# Altium PCB ColorSS_v2_PCB.PcbDoc
Units mm, origin at the board's own origin, x right, y up, seen from the top; angles counter-clockwise.
Board outline 22.5 x 38.5 mm, 2 copper layers (Top Layer, Bottom Layer), stack 1.571 mm thick; 25 components, 22 nets, 79 pads, 12 vias.
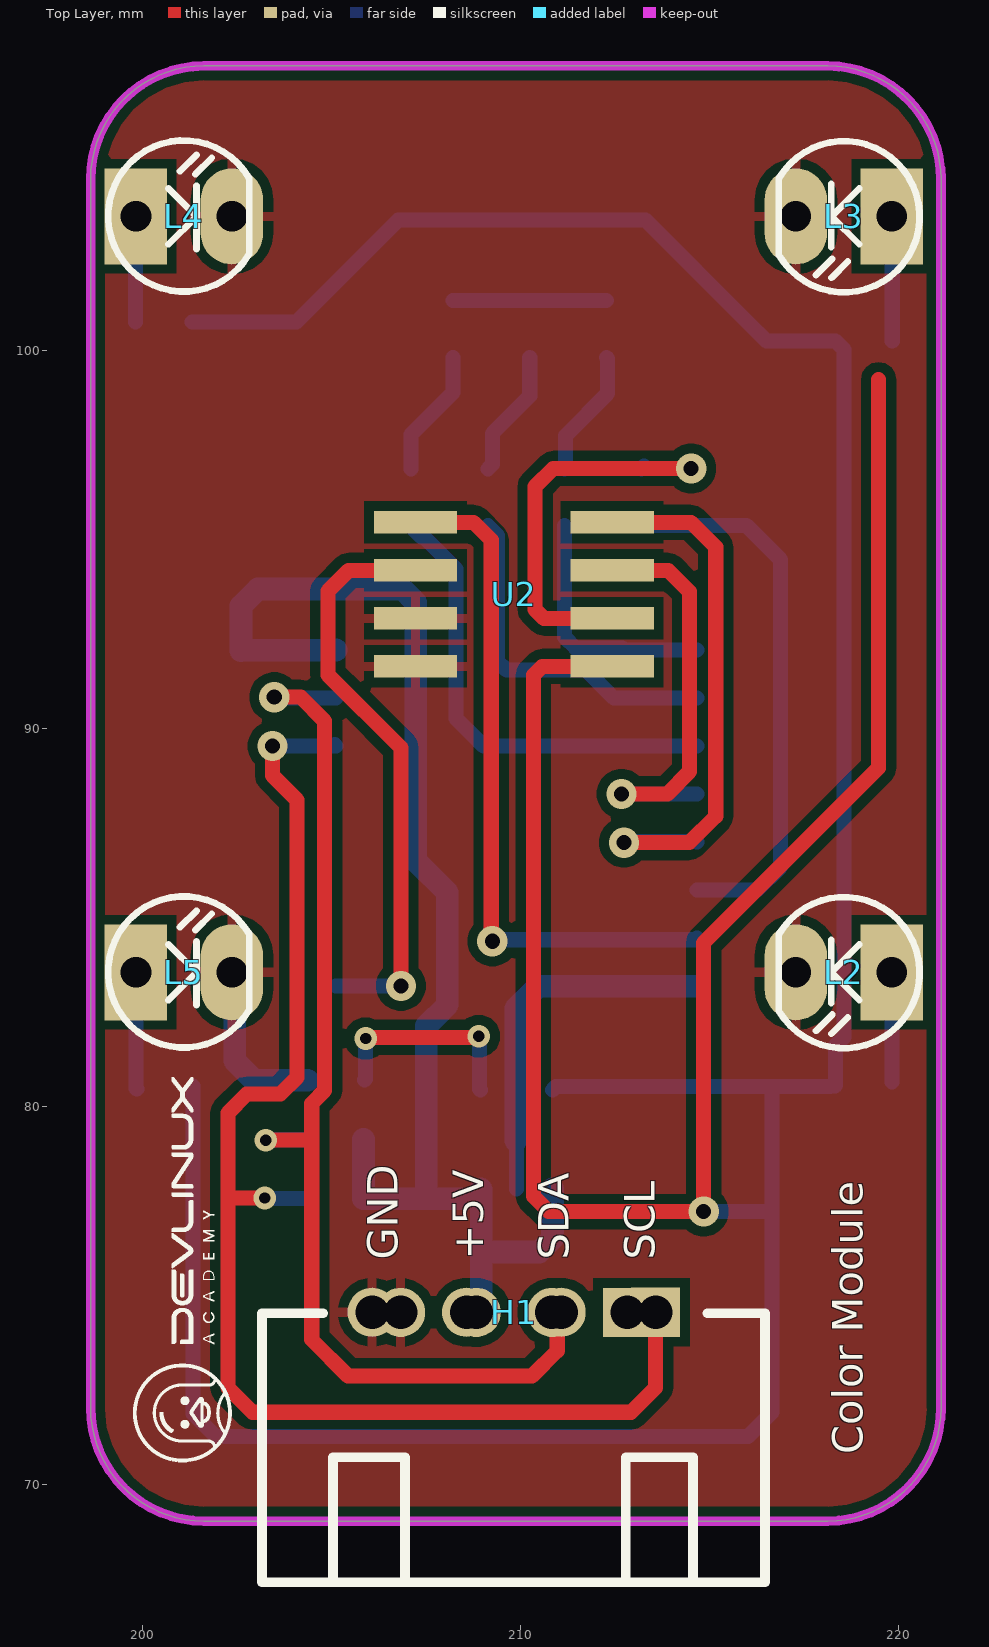
[diagram p0: Top Layer view]
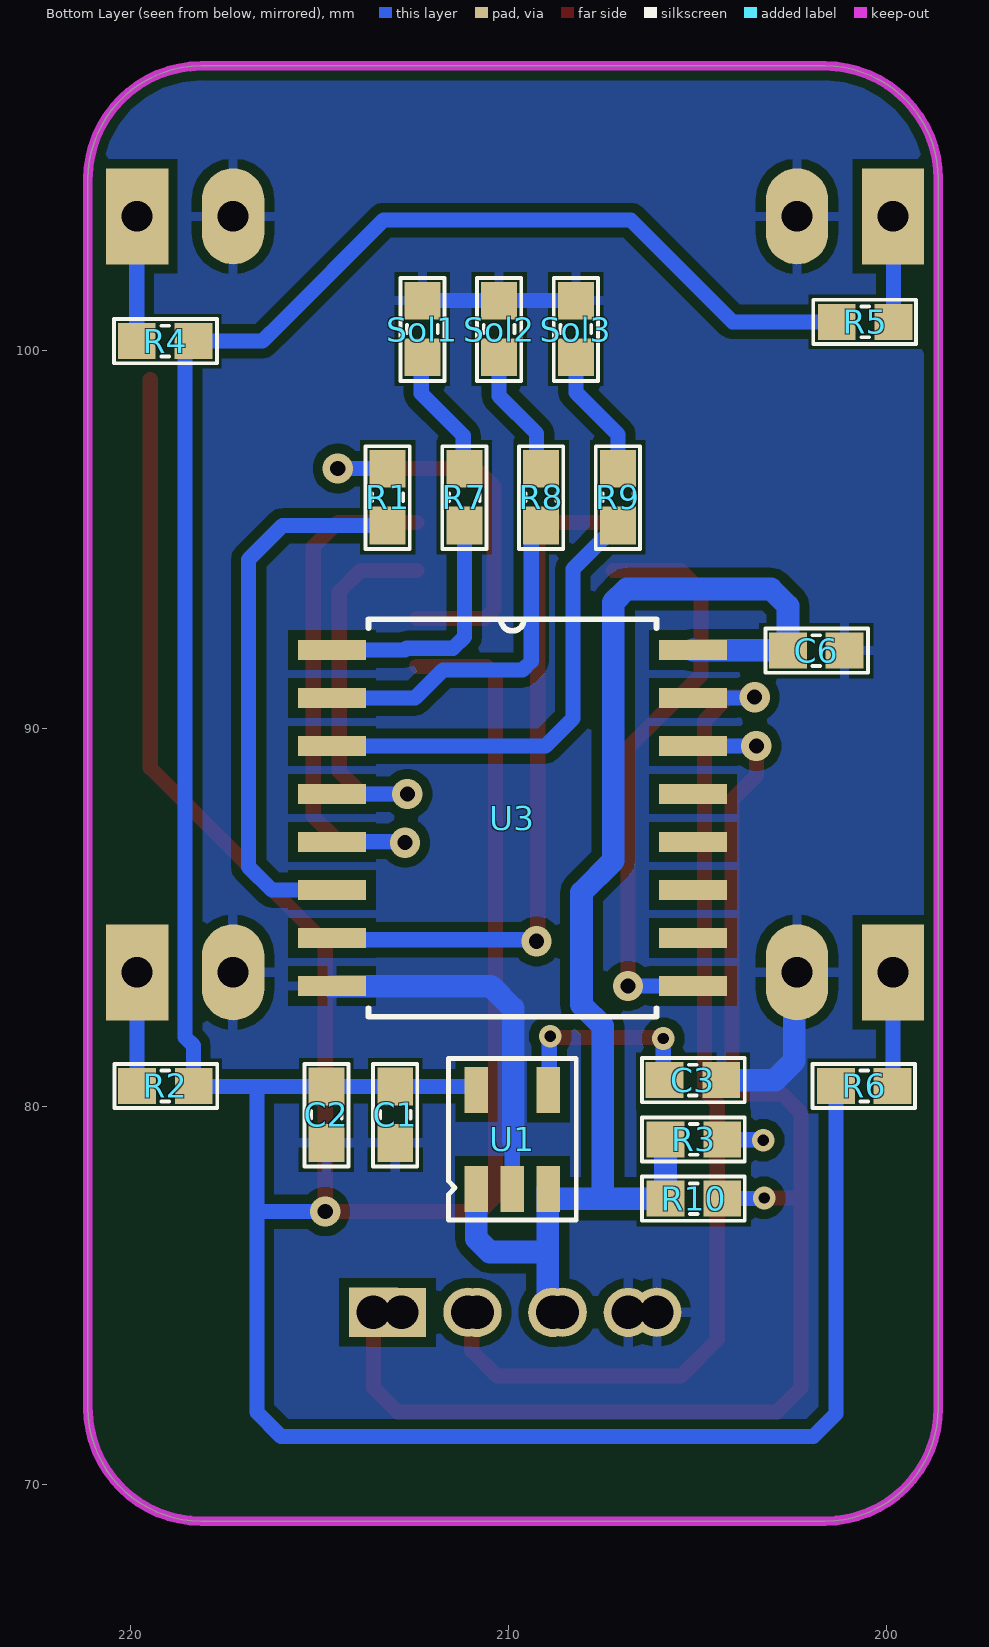
[diagram p1: Bottom Layer view, seen from below]
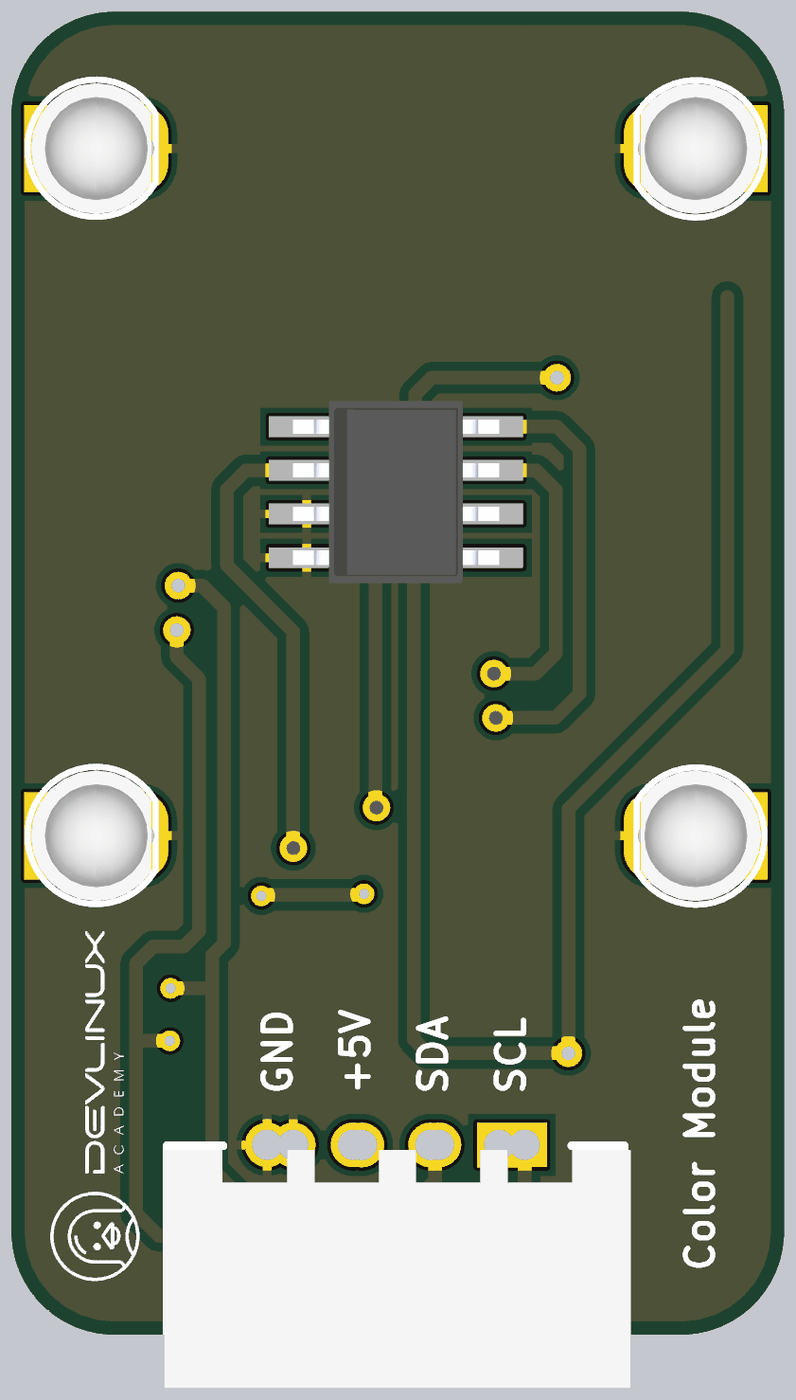
[diagram p2: 3D render of the assembled board from above, using the file's embedded part models]
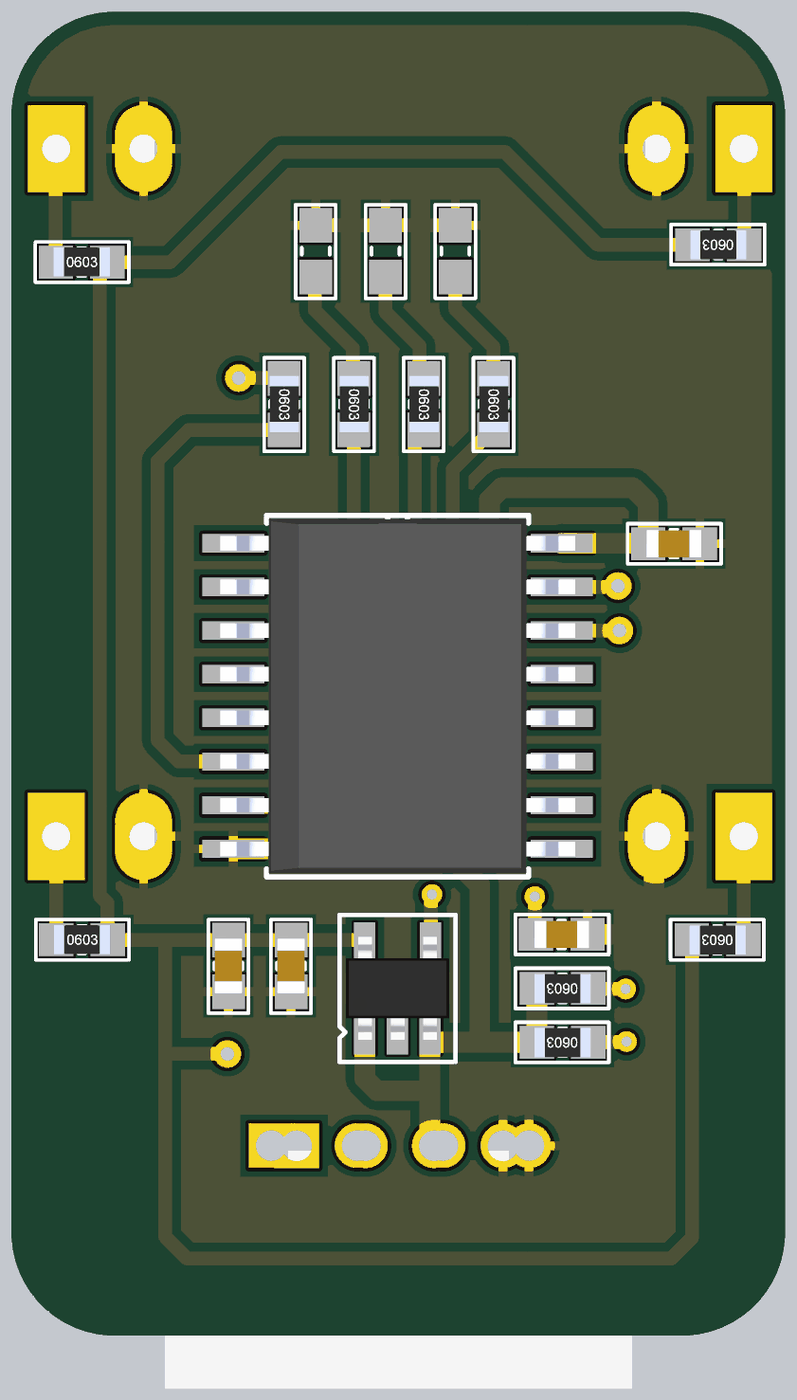
[diagram p3: 3D render of the assembled board from below, using the file's embedded part models]

## Layer stack, top to bottom
Top Solder: solder mask 0.0102, Solder Resist, Dk 3.5
Top Layer: signal copper 0.0356
Dielectric 1: dielectric 1.5, FR-4, Dk 4.8
Bottom Layer: signal copper 0.0356
Bottom Solder: solder mask 0.0102, Solder Resist, Dk 3.5

## Board outline
198.62,72.02 198.62,104.52 cw(c201.62,104.52) 201.62,107.52 218.12,107.52 cw(c218.12,104.52) 221.12,104.52 221.12,72.02 cw(c218.12,72.02) 218.12,69.02 201.62,69.02 cw(c201.62,72.02)

## Design rules (kind name [scope] priority, off if disabled: settings)
Clearance [All] p1: gap=0.254 ignorepadtopadclearanceinfootprint=FALSE except(0: Arc-Hole Track-Hole SMDPad-Hole THPad-Hole Via-Hole Fill-Hole Poly-Hole Region-Hole Text-Hole; 0.178: Arc-Arc Arc-Track Arc-SMDPad Arc-THPad Track-Track Track-SMDPad Track-THPad SMDPad-SMDPad SMDPad-THPad THPad-THPad)
PolygonConnect [All] p1: connectstyle=Relief reliefconductorwidth=0.254 reliefentries=4 polygonreliefangle="90 Angle" airgapwidth=0.254
RoomDefinition ColorSS_v2_SCH [InComponentClass('ColorSS_v2_SCH')] p1: confinementstyle=ConfineIn formatcopy=TRUE lockcomponents=FALSE outline 178.943,26.924 259.715,26.924 259.715,45.085 178.943,45.085
RoutingVias [All] p1: holewidth=0.4 width=0.8 viastyle="Through Hole" minholewidth=0.3 minwidth=0.6 maxholewidth=0.5 maxwidth=1
SolderMaskExpansion [All] p1: expansion=0.102 istentingtop=FALSE
Width [All] p1: maxlimit=0.6 minlimit=0.254 preferedwidth=0.4
30 further rules are at their usual default settings.

## Components (designator, comment, footprint, x,y, rotation, side; value= is the part's Value field where it differs from the comment)
C1 "10uF" "tu 0603" 212.99,79.77 r270 bottom
C2 "100nF" "tu 0603" 214.81,79.77 r270 bottom
C3 "22nF" "tu 0603" 205.115,80.686 r180 bottom
C6 "100nF" "tu 0603" 201.85,92.05 r180 bottom
H1 "Header 4P 2.54 + 2.0 Duc Cong" "Header 4P DC 2.54 + 2.0" 213.543,74.519 r270 top
L2 "LED 3mm" LED-3MM-WHITE 219.82,83.54 r180 top
L3 "LED 3mm" LED-3MM-WHITE 219.82,103.54 r180 top
L4 "LED 3mm" LED-3MM-WHITE 199.82,103.54 r0 top
L5 "LED 3mm" LED-3MM-WHITE 199.82,83.54 r0 top
R1 "1k" "tro smd 0603" 213.19,96.11 r270 bottom
R2 "330R" "tro smd 0603" 219.07,80.532 r180 bottom
R3 "10k" "tro smd 0603" 205.09,79.118 r0 bottom
R4 "330R" "tro smd 0603" 219.08,100.24 r180 bottom
R5 "330R" "tro smd 0603" 200.56,100.75 r0 bottom
R6 "330R" "tro smd 0603" 200.58,80.532 r0 bottom
R7 "1k" "tro smd 0603" 211.16,96.11 r270 bottom
R8 "1k" "tro smd 0603" 209.13,96.11 r270 bottom
R9 "1k" "tro smd 0603" 207.1,96.11 r270 bottom
R10 "10k" "tro smd 0603" 205.09,77.55 r0 bottom
Sol1 "0603" "Solder 0603" 212.27,100.56 r270 bottom
Sol2 "0603" "Solder 0603" 210.24,100.56 r270 bottom
Sol3 "0603" "Solder 0603" 208.21,100.56 r270 bottom
U1 "RT9193-33GB" SOT23-5 209.89,79.12 r180 bottom
U2 "TCS3200D" SOIC8 209.82,93.54 r0 top
U3 "PCF8574AT" SOIC127P1032X265-16N 209.89,87.62 r180 bottom

## Footprints (in the part's own frame and the unit in brackets; to place one, negate y for a bottom-side part, rotate by r counter-clockwise, add the part's x,y. Pads: shape width x height; smd on the part's side, far side on the other; paste and mask are expansions set on the pad)
"Header 4P DC 2.54 + 2.0" [mm]
  rect 1.3x1.3 hole 0.889: 1(-0.025,0.025) 1(-0.022,-0.719)
  round 1.3 hole 0.889: 2(-0.025,-2.475) 2(-0.022,-2.719) 3(-0.025,-4.975) 3(-0.022,-4.719) 4(-0.025,-7.475) 4(-0.022,-6.718)
  silkscreen extent 0,-10.39 7.11,2.92, body extent 0.13,-10.48 7.06,3.11, height 7.38
LED-3MM-WHITE [mil] "LED 2 PIN, 3ly Only colour"
  rect 65x100 hole 32: 1(0,0)
  oval 65x100 hole 32: 2(100,0)
  silkscreen extent -29,-78 118,79, body extent -25,-75 113,75, height 217
SOIC8 [mm]
  rect 2.2x0.6 smd: 1(-2.6,1.905) 2(-2.6,0.635) 3(-2.6,-0.635) 4(-2.6,-1.905) 5(2.6,-1.905) 6(2.6,-0.635) 7(2.6,0.635) 8(2.6,1.905)
  body extent -3,-2.65 3,2.65, height 1.75
SOIC127P1032X265-16N [mil]
  rect 71x21 smd: 1(-188,175) 2(-188,125) 3(-188,75) 4(-188,25) 5(-188,-25) 6(-188,-75) 7(-188,-125) 8(-188,-175) 9(188,-175) 10(188,-125) 11(188,-75) 12(188,-25) 13(188,25) 14(188,75) 15(188,125) 16(188,175)
  silkscreen extent -150,-207 150,207, body extent -203,-203 203,203, height 104
"Solder 0603" [mm] "Chip Capacitor, 2-Leads, Body 1,60x0,80mm, IPC Medium Density"
  rect 1x0.95 smd mask+0.076: 1(-0.75,0) 2(0.75,0)
  silkscreen extent -1.35,-0.58 1.37,0.58
SOT23-5 [mm] "CASE: SOT"
  rect 0.62x1.22 smd mask+0.076: 1(-0.953,-1.31) 2(-0.003,-1.31) 3(0.947,-1.31) 4(0.952,1.31) 5(-0.953,1.31)
  silkscreen extent -1.69,-2.14 1.69,2.14, body extent -1.5,-1.5 1.5,1.5, height 1.41
"tro smd 0603" [mm] "Chip Capacitor, 2-Leads, Body 1,60x0,80mm, IPC Medium Density"
  rect 1x0.95 smd mask+0.076: 1(-0.75,0) 2(0.75,0)
  silkscreen extent -1.35,-0.58 1.37,0.58, body extent -0.82,-0.42 0.82,0.43, height 0.44
"tu 0603" [mm] "Chip Capacitor, 2-Leads, Body 1,60x0,80mm, IPC Medium Density"
  rect 1x0.95 smd mask+0.076: 1(-0.75,0) 2(0.75,0)
  silkscreen extent -1.35,-0.58 1.37,0.58, body extent -0.8,-0.4 0.8,0.4, height 0.9

## Part data
C1: library part "Tu 0603 106 16V 20%", "Dán", Chung_Loai=Dán, Don_Vi=Con, Ma_Hang=MH004848, So_Chan=2, Ten_Linh_Kien="Tụ 0603-10uF 20% 16V"
C2 C3 C6: library part "Tu 0603 104 50V 10%", "Dán", Chung_Loai=Dán, Don_Vi=Con, Ma_Hang=MH004568, So_Chan=2, Ten_Linh_Kien="Tụ 0603 104-100nF 10% 50V"
H1: "Cắm", Chung_Loai=Cắm, Don_Vi=Con, Ma_Hang=MH001310, Ten_Linh_Kien="Header 4P XH2.54-4P Đực Cong"
L2 L3 L4 L5: library part "LED 3mm Trang", "Cắm", Chung_Loai=Cắm, Don_Vi=Con, Ma_Hang=MH009001, Ten_Linh_Kien="LED 3MM Trắng SS (1000c)"
R1 R7 R8 R9: library part "Tro 0603 1% 1k", "Dán", Chung_Loai=Dán, Don_Vi=Con, Ma_Hang=MH006334, So_Chan=2, Ten_Linh_Kien="Trở 0603 1% 1k"
R2 R3 R4 R5 R6 R10: library part "Tro 0603 5% 330R", "Dán", Chung_Loai=Dán, Don_Vi=Con, Ma_Hang=MH006910, So_Chan=2, Ten_Linh_Kien="Trở 0603 5% 330R"
Sol1 Sol2 Sol3: library part "Solder 0603", "Dán", Chung_Loai=Dán, Don_Vi=Con, So_Chan=2, Ten_Linh_Kien="Chân hàn 0603"
U1: library part REG_5.5V-3.3V-0.3A-1W-SOT-23-5, "Linear Voltage Regulator IC 1 Output 300mA SOT-23-5", Alternate Part Number-1=NA, Case/Package=SOT-23-5, Manufacturer="Richtek USA Inc.", Supplier Part Number-1=C15651, Manufacturer Part Number=RT9193-33GB, Supplier-1=LCSC
U2: "Color Sensor - Auto Power Down 8-SOIC (0.154, 3.90mm Width)", Package="SOIC-8 ams", Check_prices=https://www.snapeda.com/parts/TCS3200D/ams/view-part/?ref=eda, MF=ams, MP=TCS3200D, SnapEDA_Link=https://www.snapeda.com/parts/TCS3200D/ams/view-part/?ref=snap
U3: "IÂ²C Bus IC Operating temperature: -40...+85 Â°C Power supply: 2.5...6 V Package: SO-16W", Package="SOIC-16 NXP Semiconductors", Check_prices=https://www.snapeda.com/parts/PCF8574AT/NXP+Semiconductors/view-part/?ref=eda, MF="NXP USA", MP=PCF8574AT, SnapEDA_Link=https://www.snapeda.com/parts/PCF8574AT/NXP+Semiconductors/view-part/?ref=snap

## Via types
v1: diameter 0.8, hole 0.4, Top Layer to Bottom Layer, 8 vias
v2: diameter 0.6, hole 0.3, Top Layer to Bottom Layer, 4 vias

## Nets (pads, with @x,y where several pads share a name; then routed paths per layer and width w, separated by ;. In a path a pad name is that pad's centre, name@x,y a point inside that pad or via, vN(x,y) a via of type N, cw(c..) or ccw(c..) an arc to the next point about the centre after c; other vN are vias at no path point)
+3V3: C1.1 C2.1 R2.2 R4.2 R5.2 R6.2 U1.5 U2.5 | length 126.3
  Top Layer w0.4: U2.5 210.569,91.635 210.335,91.401 210.335,77.615 210.74,77.21 v1(214.84,77.21) 214.84,84.32 219.47,88.95 219.47,99.22
  Bottom Layer w0.4: R5.2 204.07,100.75 206.76,103.44 213.3,103.44 216.02,100.72 216.5,100.24 R4.2 218.55,100.02 218.55,81.82 218.33,81.6 218.33,80.542 R2.2 ; R6.2 201.33,71.86 201.93,71.26 216.01,71.26 216.65,71.9 216.65,80.52 ; U1.5 210.933,80.52 C1.1 C2.1 216.65,80.52 ; v1(214.84,77.21) 216.65,77.21 ; R2.2@218.2,80.52 216.65,80.52
+5: C6.1 H1.3 R3.2 R10.2 U1.1 U1.3 U3.16 | length 36.4
  Bottom Layer w0.6: U3.16 205.107,92.057 202.608,92.057 C6.1 202.6,93.23 203.05,93.68 206.869,93.68 207.22,93.329 207.22,86.49 208.06,85.65 208.06,82.678 207.5,82.118 207.5,77.81 207.5,77.55 ; R3.2 R10.2 207.5,77.55 ; H1.3@208.824,74.541 208.953,74.67 208.953,76.14 208.953,76.741 208.953,77.55 208.953,77.8 U1.3 208.943,77.56 208.933,77.55 207.5,77.55 ; 209.172,76.14 210.491,76.14 210.843,76.491 U1.1
A_OUT: R1.2 U3.6 | length 14.6
  Bottom Layer w0.4: R1.2 215.97,95.36 216.87,94.46 216.87,86.33 216.255,85.715 U3.6
GND: C1.2 C2.2 C3.2 C6.2 H1.4 L2.2 L3.2 L4.2 L5.2 Sol1.1 Sol2.1 Sol3.1 U1.2 U2.3 U2.4 U3.8 | length 18.4
  Bottom Layer w0.4: Sol3.1 Sol2.1 Sol1.1 ; 209.87,79.09 209.893,79.067 U1.2
  Bottom Layer w0.6: L5.2 202.43,83.47 202.43,81.2 202.944,80.686 C3.2 ; 209.87,79.09 209.87,82.58 210.465,83.175 U3.8
NetC3_1: C3.1 U1.4 | length 5.6
  Top Layer w0.4: v2(205.898,81.788) 205.929,81.819 208.859,81.819 v2(208.89,81.85)
  Bottom Layer w0.4: C3.1 205.898,80.718 v2(205.898,81.788) ; v2(208.89,81.85) 208.914,81.826 208.914,80.454 U1.4
NetL2_1: L2.1 R2.1 | length 2.9
  Bottom Layer w0.4: R2.1@219.82,80.64 L2.1
NetL3_1: L3.1 R4.1 | length 3.3
  Bottom Layer w0.4: L3.1 219.83,103.53 R4.1
NetL4_1: L4.1 R5.1 | length 2.8
  Bottom Layer w0.4: R5.1 199.81,103.53 L4.1
NetL5_1: L5.1 R6.1 | length 3.1
  Bottom Layer w0.4: L5.1 199.82,80.47 R6.1@199.84,80.45
NetR1_1: R1.1 U2.6 | length 11.1
  Top Layer w0.4: U2.6 210.614,92.905 210.38,93.139 210.38,96.39 210.86,96.87 v1(214.51,96.87)
  Bottom Layer w0.4: R1.1 213.262,96.932 213.328,96.865 214.505,96.865 v1(214.51,96.87)
NetR7_1: R7.1 Sol1.2 | length 3.4
  Bottom Layer w0.4: R7.1 211.19,96.89 211.19,97.74 212.3,98.85 212.3,99.78 Sol1.2
NetR7_2: R7.2 U3.1 | length 6.6
  Bottom Layer w0.4: R7.2 211.16,92.41 211.457,92.113 212.686,92.113 212.734,92.065 U3.1
NetR8_1: R8.1 Sol2.2 | length 3.4
  Bottom Layer w0.4: R8.1 209.25,96.98 209.25,97.8 210.24,98.79 Sol2.2
NetR8_2: R8.2 U3.2 | length 9.4
  Bottom Layer w0.4: R8.2 209.39,95.1 209.39,91.769 209.624,91.535 211.724,91.535 212.464,90.795 U3.2
NetR9_1: R9.1 Sol3.2 | length 3.4
  Bottom Layer w0.4: R9.1 207.1,97.77 208.21,98.88 Sol3.2
NetR9_2: R9.2 U3.3 | length 12.3
  Bottom Layer w0.4: R9.2 207.1,95.335 207.375,95.06 207.44,95.06 208.288,94.212 208.288,90.252 209.015,89.525 U3.3
S0: U2.1 U3.7 | length 18.3
  Top Layer w0.4: U2.1 208.755,95.445 209.22,94.98 209.22,84.39 v1(209.25,84.36)
  Bottom Layer w0.4: v1(209.25,84.36) 209.293,84.403 214.623,84.403 U3.7
S1: U2.2 U3.9 | length 15.5
  Top Layer w0.4: v1(206.83,83.18) 206.83,89.48 204.9,91.41 204.9,93.63 205.445,94.175 U2.2
  Bottom Layer w0.4: U3.9 205.117,83.177 206.828,83.177 v1(206.83,83.18)
S2: U2.7 U3.4 | length 11
  Top Layer w0.4: U2.7 213.905,94.175 214.47,93.61 214.47,88.85 213.88,88.26 v1(212.67,88.26)
  Bottom Layer w0.4: v1@212.75,88.25 212.753,88.253 214.663,88.253 U3.4
S3: U2.8 U3.5 | length 14.7
  Top Layer w0.4: U2.8 214.505,95.445 215.16,94.79 215.16,87.67 214.46,86.97 v1@212.74,86.97
  Bottom Layer w0.4: v1@212.8,87.02 212.818,87.003 214.648,87.003 U3.5
  other v1: 212.73,86.97
SCL: H1.1 R10.1 U3.14 | length 36.2
  Top Layer w0.4: v2(203.23,77.57) 202.282,77.57 202.252,77.54 ; v1(203.435,89.525) 203.435,88.745 204.08,88.1 204.08,80.76 203.64,80.32 202.75,80.32 202.252,79.822 202.252,77.54 ; H1.1@213.568,74.544 213.568,72.548 212.92,71.9 202.9,71.9 202.252,72.548 202.252,77.54
  Bottom Layer w0.4: v2(203.23,77.57) 203.24,77.56 204.33,77.56 R10.1 ; v1@203.42,89.54 v1(203.435,89.525) U3.14 U3.14@205.08,89.56
SDA: H1.2 R3.1 U3.15 | length 30.1
  Top Layer w0.4: v2(203.254,79.1) 204.47,79.1 ; v1(203.48,90.82) 204.18,90.82 204.81,90.19 204.81,80.41 204.47,80.07 204.47,79.1 ; H1.2@210.965,74.4 210.965,73.525 210.3,72.86 205.43,72.86 204.47,73.82 204.47,79.1
  Bottom Layer w0.4: v2(203.254,79.1) 203.263,79.109 204.331,79.109 R3.1 ; v1(203.48,90.82) 203.505,90.795 U3.15
pads on no net: U3.10 U3.11 U3.12 U3.13

## Polygon pours and split planes (outlines as drawn)
GND on Bottom Layer "NONET_L-01_P-001" (solid, remove dead copper, pour order 1): 196.63,113.95 225.15,113.95 225.3,114.1 225.3,66.45 196.94,66.45 196.63,66.76
GND on Top Layer "NONET_L-01_P-001" (solid, remove dead copper, pour order 0): 196.79,113.95 196.87,113.87 225.3,113.87 225.3,66.44 224.99,66.13 224.52,66.6 196.87,66.6

## Keep-outs
Keep-Out Layer:
  the board outline again, w0.254

## Silkscreen, mask and mechanical layers (free items; w line width, h text height)
Top Overlay:
  drawing of 21 lines, arcs and shapes, not listed
  text "GND" at 206.75,75.94 h0.8 r90
  text "+5V" at 209.013,75.94 h0.8 r90
  text "SDA" at 211.277,75.94 h0.8 r90
  text "SCL" at 213.54,75.94 h0.8 r90
  text "Color Module" at 219.05,70.79 h0.8 r90